# EAGLE board QuicOvero (EAGLE 5.06)
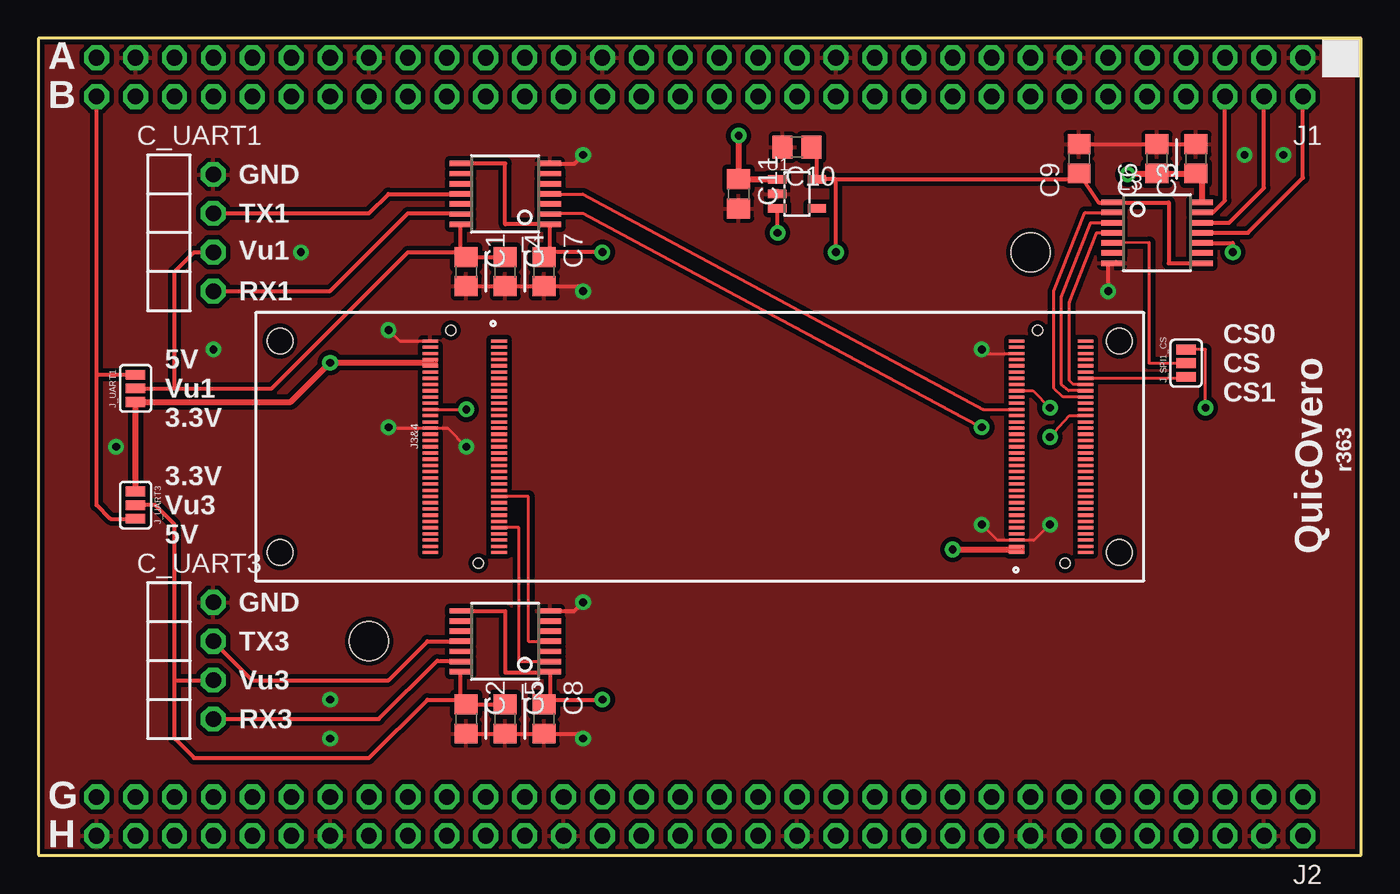
[diagram p0: board, top side]
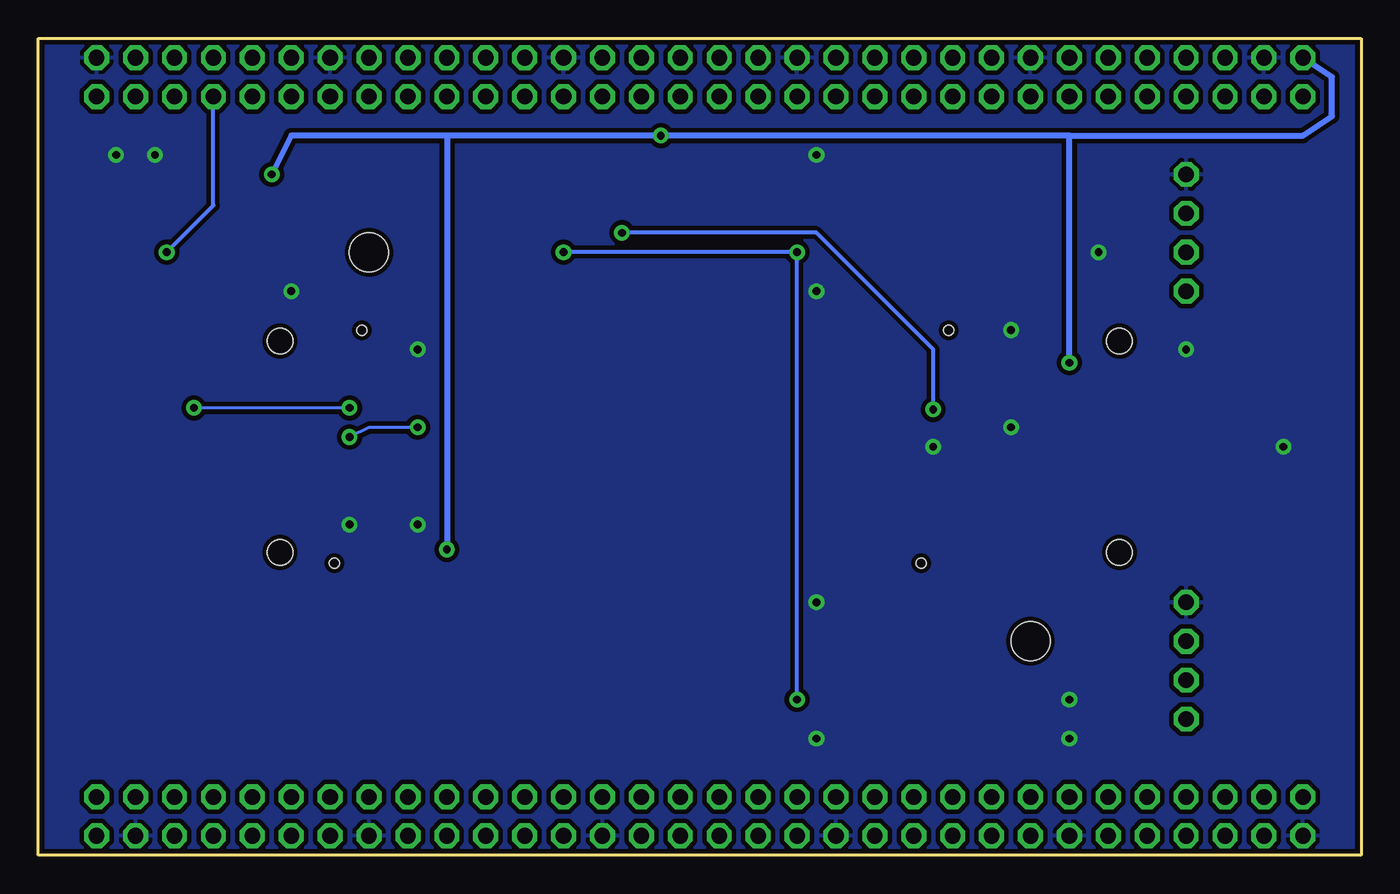
[diagram p1: board, bottom side, seen from below]

Size 86.36 x 53.34 mm. Coordinates in mm from the lower left corner, seen from the top.
Outline: 0,0 86.36,0 86.36,53.34 0,53.34 0,0
Copper layers (1*16): Top 0.035mm / dielectric 1.5mm / Bottom 0.035mm
Design rules "SparkFun": minimum track width 8mil, minimum drill 20mil, track to track 8mil, track to pad 8mil, pad to pad 8mil, via to via 8mil, smd to smd 8mil, copper to edge 10mil, drill to drill 8mil, minimum pad ring 12mil, minimum via ring 10mil, stop-mask expansion 4mil, vias tented up to drill 25mil, thermal gap 10mil
Net classes: 1 supply: width 0.203 mm; 4 xxwide: width 0.203 mm; 5 USB: width 0.191 mm
Holes 2.54 mm at 21.59,13.97 64.77,39.37

## Footprints (pad centres in the part's own frame; a part is rotated, then mirrored left to right if it is on the bottom)
C0805 = smd 1.3 x 1.5: 1 -0.95,0; 2 0.95,0
1X04/90 = drill 1.016 octagon: 1 -3.81,-0.01; 2 -1.27,-0.01; 3 1.27,-0.01; 4 3.81,-0.01
2X32/NOSILK = drill 1.016 octagon: 1 -39.37,-1.27; 2 -39.37,1.27; 3 -36.83,-1.27; 4 -36.83,1.27; 5 -34.29,-1.27; 6 -34.29,1.27; 7 -31.75,-1.27; 8 -31.75,1.27; 9 -29.21,-1.27; 10 -29.21,1.27; 11 -26.67,-1.27; 12 -26.67,1.27; 13 -24.13,-1.27; 14 -24.13,1.27; 15 -21.59,-1.27; 16 -21.59,1.27; 17 -19.05,-1.27; 18 -19.05,1.27; 19 -16.51,-1.27; 20 -16.51,1.27; 21 -13.97,-1.27; 22 -13.97,1.27; 23 -11.43,-1.27; 24 -11.43,1.27; 25 -8.89,-1.27; 26 -8.89,1.27; 27 -6.35,-1.27; 28 -6.35,1.27; 29 -3.81,-1.27; 30 -3.81,1.27; 31 -1.27,-1.27; 32 -1.27,1.27; 33 1.27,-1.27; 34 1.27,1.27; 35 3.81,-1.27; 36 3.81,1.27; 37 6.35,-1.27; 38 6.35,1.27; 39 8.89,-1.27; 40 8.89,1.27; 41 11.43,-1.27; 42 11.43,1.27; 43 13.97,-1.27; 44 13.97,1.27; 45 16.51,-1.27; 46 16.51,1.27; 47 19.05,-1.27; 48 19.05,1.27; 49 21.59,-1.27; 50 21.59,1.27; 51 24.13,-1.27; 52 24.13,1.27; 53 26.67,-1.27; 54 26.67,1.27; 55 29.21,-1.27; 56 29.21,1.27; 57 31.75,-1.27; 58 31.75,1.27; 59 34.29,-1.27; 60 34.29,1.27; 61 36.83,-1.27; 62 36.83,1.27; 63 39.37,-1.27; 64 39.37,1.27
GUMSTIX_OVERO = smd 1.016 x 0.203: ADCIN2 17.6,-2.032; ADCIN3 17.6,2.032; ADCIN4 17.6,5.283; ADCIN5 17.6,0.813; ADCIN6 17.6,0; ADCIN7 17.6,-4.47; AGND 17.6,1.219; AUXLF 17.6,6.096; AUXRF 17.6,4.877; EM_A1 -25.2,2.032; EM_A2 -20.7,2.845; EM_A3 -25.2,2.438; EM_A4 -25.2,3.251; EM_A5 -20.7,2.032; EM_A6 -25.2,1.626; EM_A7 -20.7,1.626; EM_A8 -20.7,2.438; EM_A9 -25.2,3.658; EM_A10 -25.2,2.845; EM_CLK -25.2,6.909; EM_D0 -25.2,1.219; EM_D1 -25.2,0; EM_D2 -20.7,1.219; EM_D3 -20.7,0.406; EM_D4 -20.7,-0.406; EM_D5 -20.7,-1.219; EM_D6 -25.2,-0.813; EM_D7 -25.2,-1.626; EM_D8 -25.2,0.406; EM_D9 -25.2,0.813; EM_D10 -20.7,0.813; EM_D11 -20.7,0; EM_D12 -20.7,-0.813; EM_D13 -25.2,-0.406; EM_D14 -25.2,-1.219; EM_D15 -20.7,-1.626; EM_NADV_ALE -20.7,4.47; EM_NBE0 -25.2,4.877; EM_NBE1 -25.2,6.502; EM_NCS0 -25.2,5.283; EM_NCS1 -25.2,4.47; EM_NCS4 -20.7,5.283; EM_NCS5_ETH0 -20.7,5.69; EM_NCS6 -25.2,5.69; EM_NOE -20.7,4.064; EM_NWE -20.7,4.877; EM_NWP -25.2,4.064; EM_WAIT0 -25.2,6.096; GND -20.7,6.096; GND@33 -20.7,-6.096; GND@56 17.6,-1.219; GND@70 17.6,-6.909; GPIO0_WAKEUP 13.1,-3.658; GPIO12_MMC3_CLK -25.2,-5.283; GPIO13_MMC3_CMD -20.7,-2.032; GPIO14_MMC3_DAT4 -20.7,-4.47; GPIO17_MMC3_D3 -20.7,-5.283; GPIO18_MMC3_D0 -20.7,-3.251; GPIO19_MMC3_D1 -25.2,-6.909; GPIO20_MMC3_D2 -25.2,-5.69; GPIO21_MMC3_DAT7 -20.7,-4.877; GPIO22_MMC3_DAT6 -25.2,-6.502; GPIO23_MMC3_DAT5 -25.2,-6.096; GPIO64_ETH0_NRESET -20.7,3.251; GPIO65_ETH1_IRQ1 -20.7,3.658; GPIO66_L_PCLK 13.1,5.69; GPIO67_L_LCLK 13.1,6.909; GPIO68_L_FCLK 13.1,6.502; GPIO69_L_BIAS 17.6,4.064; GPIO70_L_DD00 13.1,-6.096; GPIO71_L_DD01 13.1,-6.502; GPIO72_L_DD02 13.1,-4.877; GPIO73_L_DD03 13.1,-5.69; GPIO74_L_DD04 13.1,-4.47; GPIO75_L_DD05 13.1,-5.283; GPIO76_L_DD06 13.1,6.096; GPIO77_L_DD07 13.1,4.47; GPIO78_L_DD08 13.1,4.877; GPIO79_L_DD09 13.1,4.064; GPIO80_L_DD10 13.1,-2.845; GPIO81_L_DD11 13.1,-2.438; GPIO82_L_DD12 17.6,-2.845; GPIO83_L_DD13 13.1,-0.406; GPIO84_L_DD14 13.1,0.406; GPIO85_L_DD15 13.1,0.813; GPIO86_L_DD16 17.6,3.658; GPIO87_L_DD17 13.1,2.438; GPIO88_L_DD18 13.1,2.845; GPIO89_L_DD19 13.1,3.658; GPIO90_L_DD20 17.6,3.251; GPIO91_L_DD21 13.1,2.032; GPIO92_L_DD22 13.1,-1.219; GPIO93_L_DD23 17.6,-3.251; GPIO114_SPI1_NIRQ -25.2,-4.877; GPIO127_TS_IRQ 13.1,-4.064; GPIO128_GPS_PPS 13.1,-1.626; GPIO144_GPT9_PWM 13.1,0; GPIO145_GPT10_PWM 17.6,-0.813; GPIO146_GPT11_PWM 13.1,1.219; GPIO147_GPT8_PWM 13.1,-0.813; GPIO148_TXD1 -20.7,-2.438; GPIO149_MMC3_CD -25.2,-2.845; GPIO150_MMC3_WP -25.2,-2.438; GPIO151_RXD1 -25.2,-2.032; GPIO163_IR_CTS3 13.1,1.626; GPIO165_IR_RXD3 13.1,5.283; GPIO166_IR_TXD3 13.1,3.251; GPIO168_USBH_CPEN -20.7,-4.064; GPIO170_HDQ_1WIRE 17.6,2.438; GPIO171_SPI1_CLK -25.2,-4.064; GPIO172_SPI1_MOSI -25.2,-3.658; GPIO173_SPI1_MISO -25.2,-3.251; GPIO174_SPI1_CS0 -20.7,-3.658; GPIO175_SPI1_CS1 -25.2,-4.47; GPIO176_ETH0_IRQ -20.7,-2.845; GPIO184_I2C3_SCL 13.1,-2.032; GPIO185_I2C3_SDA 13.1,-3.251; HSOLF 17.6,-6.096; HSORF 17.6,-6.502; MIC_MAIN_MF 17.6,-1.626; MIC_SUB_MF 17.6,5.69; N_MANUAL_RESET 13.1,-6.909; NC@62 17.6,-3.658; NC@63 17.6,-4.064; POWERON 17.6,-4.877; PWM0 17.6,4.47; PWM1 17.6,1.626; SYSEN 17.6,-2.438; USBH_DM -20.7,-6.909; USBH_DP -20.7,-6.502; USBH_VBUS -20.7,-5.69; USBOTG_DM 17.6,6.502; USBOTG_DP 17.6,6.909; USBOTG_ID 17.6,2.845; USBOTG_VBUS 17.6,-0.406; VBACKUP 17.6,0.406; VSYSTEM@1 -20.7,6.909; VSYSTEM@2 -20.7,6.502; VSYSTEM@66 17.6,-5.283; VSYSTEM@67 17.6,-5.69 | hole 1.65: 27.4,6.9; 27.4,-6.9; -27.4,6.9; -27.4,-6.9 | hole 0.65: -23.85,7.6; -22.05,-7.6; 14.45,7.6; 16.25,-7.6
SJ_3 = smd 0.635 x 1.27: 1 -0.889,0; 2 0,0; 3 0.889,0
TSSOP-14 = smd 1.422 x 0.356: 1 -2.921,1.981; 2 -2.921,1.321; 3 -2.921,0.66; 4 -2.921,0; 5 -2.921,-0.66; 6 -2.921,-1.321; 7 -2.921,-1.981; 8 2.921,-1.981; 9 2.921,-1.321; 10 2.921,-0.66; 11 2.921,0; 12 2.921,0.66; 13 2.921,1.321; 14 2.921,1.981
SOT-23-5 = smd 0.55 x 1.2: 1 -0.95,-1.3; 2 0,-1.3; 3 0.95,-1.3; 4 0.95,1.3; 5 -0.95,1.3

## Placement (x,y rotation side)
C1  1uF  [C0805]  27.94,38.1 270 top
C2  1uF  [C0805]  27.94,8.89 270 top
C3  1uF  [C0805]  75.56,45.47 90 top
C4  0.1uF  [C0805]  30.48,38.1 270 top
C5  0.1uF  [C0805]  30.48,8.89 270 top
C6  0.1uF  [C0805]  73.03,45.47 90 top
C7  0.1uF  [C0805]  33.02,38.1 270 top
C8  0.1uF  [C0805]  33.02,8.89 270 top
C9  0.1uF  [C0805]  67.94,45.47 90 top
C10  10uF  [C0805]  49.53,46.23 180 top
C11  10uF  [C0805]  45.72,43.18 270 top
C_UART1  M04PTH90  [1X04/90]  11.43,40.64 270 top
C_UART3  M04PTH90  [1X04/90]  11.43,12.7 270 top
J1  CARDSTAC_FULL_STD_ROWS_AB_2X32_NOSILK  [2X32/NOSILK]  43.18,50.8 180 top
J2  CARDSTAC_FULL_STD_ROWS_GH_2X32_NOSILK  [2X32/NOSILK]  43.18,2.54 180 top
J3&4  GUMSTIX_OVERO  [GUMSTIX_OVERO]  43.18,26.67 180 top
J_SPI1_CS  JUMPER-3SMD  [SJ_3]  74.93,32.13 90 top
J_UART1  JUMPER-3SMD  [SJ_3]  6.35,30.48 90 top
J_UART3  JUMPER-3SMD  [SJ_3]  6.35,22.86 270 top
L1  MAX3391EEUD+  [TSSOP-14]  30.48,43.18 180 top
L2  MAX3391EEUD+  [TSSOP-14]  30.48,13.97 180 top
L3  MAX3390EEUD+  [TSSOP-14]  73.03,40.64 0 top
U1  MIC5247-1.8V  [SOT-23-5]  49.53,43.18 270 top

## Library data of the parts
C1-C9 C_UART1 C_UART3 J1 J2 J_SPI1_CS J_UART1 J_UART3 L1-L3 = Robot
C10 = Robot; DM: 0; DR: 90.000; DX: 43.000; DY: 18.800; SHEETNO: 5
C11 = Robot; DM: 0; DR: 90.000; DX: 49.400; DY: 19.200; SHEETNO: 5
J3&4 = Robot; DM: 0; DR: 0.000; DX: 33.400; DY: 8.800; SHEETNO: 3
U1 = qualified_1; DM: 0; DR: 90.000; DX: 46.400; DY: 19.200; SHEETNO: 5

## Nets
1.8V: C7.1 C8.1 C9.1 C10.1 L1.1 L1.8 L2.1 L2.8 L3.1 L3.8 U1.5
3.3V [supply]: C3.1 C6.1 C11.1 J1.63 J3&4.VSYSTEM@1 J3&4.VSYSTEM@2 J3&4.VSYSTEM@66 J3&4.VSYSTEM@67 J_UART1.1 J_UART3.1 L3.14 U1.1
3.3V_ROWH [supply]: J2.2
5V: J1.64 J_UART1.3 J_UART3.3
5V_ROWG: J2.1
ADCIN2: J3&4.ADCIN2
ADCIN3: J3&4.ADCIN3
ADCIN4: J3&4.ADCIN4
ADCIN5: J3&4.ADCIN5
ADCIN6: J3&4.ADCIN6
ADCIN7: J3&4.ADCIN7
AGND: J3&4.AGND
DUMMY_AUX1: J2.3
GND: C1.2 C2.2 C3.2 C4.2 C5.2 C6.2 C7.2 C8.2 C9.2 C10.2 C11.2 C_UART1.1 C_UART3.1 J1.1 J1.13 J1.25 J1.37 J1.49 J1.61 J2.4 J2.16 J2.28 J2.40 J2.52 J2.64 J3&4.GND J3&4.GND@33 J3&4.GND@56 J3&4.GND@70 L1.7 L2.7 L3.7 U1.2
GPIO0_WAKEUP: J3&4.GPIO0_WAKEUP
GPIO12_MMC3_CLK: J3&4.GPIO12_MMC3_CLK
GPIO13_MMC3_CMD: J3&4.GPIO13_MMC3_CMD
GPIO14_MMC3_D4: J3&4.GPIO14_MMC3_DAT4
GPIO17_MMC3_D3: J3&4.GPIO17_MMC3_D3
GPIO18_MMC3_D0: J3&4.GPIO18_MMC3_D0
GPIO18_MMC3_D2: J3&4.GPIO20_MMC3_D2
GPIO19_MMC3_D1: J3&4.GPIO19_MMC3_D1
GPIO21_MMC3_D7: J3&4.GPIO21_MMC3_DAT7
GPIO22_MMC3_D6: J3&4.GPIO22_MMC3_DAT6
GPIO23_MMC3_D5: J3&4.GPIO23_MMC3_DAT5
GPIO41_OTG_ID: J3&4.USBOTG_ID
GPIO114_SPI1_NIRQ: J3&4.GPIO114_SPI1_NIRQ
GPIO127_TS_IRQ: J3&4.GPIO127_TS_IRQ
GPIO128_GPS_PPS: J3&4.GPIO128_GPS_PPS
GPIO144_PWM9: J3&4.GPIO144_GPT9_PWM
GPIO145_PWM10: J3&4.GPIO145_GPT10_PWM
GPIO146_PWM11: J3&4.GPIO146_GPT11_PWM
GPIO147_PWM8: J3&4.GPIO147_GPT8_PWM
GPIO149_MMC3_CD: J3&4.GPIO149_MMC3_CD
GPIO150_MMC3_WP: J3&4.GPIO150_MMC3_WP
GPIO151_RXD1: J3&4.GPIO151_RXD1 L1.2
GPIO158_TXD1: J3&4.GPIO148_TXD1 L1.4
GPIO163_IR_CTS3: J3&4.GPIO163_IR_CTS3
GPIO165_IR_RXD3: J3&4.GPIO165_IR_RXD3 L2.2
GPIO166_IR_TXD3: J3&4.GPIO166_IR_TXD3 L2.4
GPIO168_USBH_CPEN: J3&4.GPIO168_USBH_CPEN
GPIO170_HDQ_1WIRE: J3&4.GPIO170_HDQ_1WIRE
GPIO171_SPI1_CLK: J3&4.GPIO171_SPI1_CLK L3.4
GPIO172_SPI1_MOSI: J3&4.GPIO172_SPI1_MOSI L3.3
GPIO173_SPI1_MISO: J3&4.GPIO173_SPI1_MISO L3.2
GPIO174_SPI1_CS0: J3&4.GPIO174_SPI1_CS0 J_SPI1_CS.3
GPIO175_SPI1_CS1: J3&4.GPIO175_SPI1_CS1 J_SPI1_CS.1
GPIO184_SCL3: J3&4.GPIO184_I2C3_SCL
GPIO185_SDA3: J3&4.GPIO185_I2C3_SDA
HSOL [analog]: J3&4.HSOLF
HSOR [analog]: J3&4.HSORF
L_BIAS: J3&4.GPIO69_L_BIAS
L_DD0: J3&4.GPIO70_L_DD00
L_DD1: J3&4.GPIO71_L_DD01
L_DD2: J3&4.GPIO72_L_DD02
L_DD3: J3&4.GPIO73_L_DD03
L_DD4: J3&4.GPIO74_L_DD04
L_DD5: J3&4.GPIO75_L_DD05
L_DD6: J3&4.GPIO76_L_DD06
L_DD7: J3&4.GPIO77_L_DD07
L_DD8: J3&4.GPIO78_L_DD08
L_DD9: J3&4.GPIO79_L_DD09
L_DD10: J3&4.GPIO80_L_DD10
L_DD11: J3&4.GPIO81_L_DD11
L_DD12: J3&4.GPIO82_L_DD12
L_DD13: J3&4.GPIO83_L_DD13
L_DD14: J3&4.GPIO84_L_DD14
L_DD15: J3&4.GPIO85_L_DD15
L_DD16: J3&4.GPIO86_L_DD16
L_DD17: J3&4.GPIO87_L_DD17
L_DD18: J3&4.GPIO88_L_DD18
L_DD19: J3&4.GPIO89_L_DD19
L_DD20: J3&4.GPIO90_L_DD20
L_DD21: J3&4.GPIO91_L_DD21
L_DD22: J3&4.GPIO92_L_DD22
L_DD23: J3&4.GPIO93_L_DD23
L_HSYNC: J3&4.GPIO67_L_LCLK
L_PCLK: J3&4.GPIO66_L_PCLK
L_VSYNC: J3&4.GPIO68_L_FCLK
LINE_IN_LA [analog]: J3&4.AUXRF
LINE_IN_RA [analog]: J3&4.AUXLF
MIC_MAIN: J3&4.MIC_MAIN_MF
MIC_SUB: J3&4.MIC_SUB_MF
NRESET: J3&4.N_MANUAL_RESET
POWERON: J3&4.POWERON
PWM0: J3&4.PWM0
PWM1: J3&4.PWM1
SH-RX1: C_UART1.4 L1.13
SH-RX3: C_UART3.4 L2.13
SH-SPI1_CLK: J1.2 L3.11
SH-SPI1_CS: J1.8 L3.10
SH-SPI1_MISO: J1.6 L3.13
SH-SPI1_MOSI: J1.4 L3.12
SH-TX1: C_UART1.2 L1.11
SH-TX3: C_UART3.2 L2.11
SPI1_CS: J_SPI1_CS.2 L3.5
SYS_EN: J3&4.SYSEN U1.3
USB_OTG_DM [USB]: J3&4.USBOTG_DM
USB_OTG_DP [USB]: J3&4.USBOTG_DP
USB_OTG_VBUS [xxwide]: J3&4.USBOTG_VBUS
USBH_DM [USB]: J3&4.USBH_DM
USBH_DP [USB]: J3&4.USBH_DP
USBH_VBUS [xxwide]: J3&4.USBH_VBUS
VAUX1_12V: J1.62
VBACKUP: J3&4.VBACKUP
VCC-UART1: C1.1 C4.1 C_UART1.3 J_UART1.2 L1.14
VCC-UART3: C2.1 C5.1 C_UART3.3 J_UART3.2 L2.14
X_ADDR_01: J3&4.EM_A1
X_ADDR_02: J3&4.EM_A2
X_ADDR_03: J3&4.EM_A3
X_ADDR_04: J3&4.EM_A4
X_ADDR_05: J3&4.EM_A5
X_ADDR_06: J3&4.EM_A6
X_ADDR_07: J3&4.EM_A7
X_ADDR_08: J3&4.EM_A8
X_ADDR_09: J3&4.EM_A9
X_ADDR_10: J3&4.EM_A10
X_CLK: J3&4.EM_CLK
X_DATA_0: J3&4.EM_D0
X_DATA_1: J3&4.EM_D1
X_DATA_2: J3&4.EM_D2
X_DATA_3: J3&4.EM_D3
X_DATA_4: J3&4.EM_D4
X_DATA_5: J3&4.EM_D5
X_DATA_6: J3&4.EM_D6
X_DATA_7: J3&4.EM_D7
X_DATA_8: J3&4.EM_D8
X_DATA_9: J3&4.EM_D9
X_DATA_10: J3&4.EM_D10
X_DATA_11: J3&4.EM_D11
X_DATA_12: J3&4.EM_D12
X_DATA_13: J3&4.EM_D13
X_DATA_14: J3&4.EM_D14
X_DATA_15: J3&4.EM_D15
X_GPIO64_ETH0_NRESET: J3&4.GPIO64_ETH0_NRESET
X_GPIO65_ETH1_IRQ1: J3&4.GPIO65_ETH1_IRQ1
X_GPIO176_ETH0_IRQ: J3&4.GPIO176_ETH0_IRQ
X_NADV_ALE: J3&4.EM_NADV_ALE
X_NBE0: J3&4.EM_NBE0
X_NBE1: J3&4.EM_NBE1
X_NCS0: J3&4.EM_NCS0
X_NCS1: J3&4.EM_NCS1
X_NCS4: J3&4.EM_NCS4
X_NCS5_ETHO: J3&4.EM_NCS5_ETH0
X_NCS6: J3&4.EM_NCS6
X_NMWP: J3&4.EM_NWP
X_NOE: J3&4.EM_NOE
X_NPWE: J3&4.EM_NWE
X_RDY: J3&4.EM_WAIT0

## Tracks (layer width: path | path; a pad name or v marks a point on that pad's centre or on a via)
1.8V  (via drill 0.51)
  Top 0.254: L3.8 73.79,38.66 73.79,42.62 L3.1 69.22,42.62 C9.1 67.94,44.13 52.07,44.13 | L2.8 30.48,15.95 30.48,11.94 33.4,11.94 L2.1 33.4,10.16 | 33.4,10.16 33.4,9.78 C8.1 | C10.1 50.83,45.72 U1.5 52.07,44.13 | L1.8 30.48,45.16 30.48,41.2 L1.1 33.4,39.37 | C7.1 33.4,39.05 33.4,39.37 | v52.07,39.37 52.07,44.13 | v36.83,39.37 33.4,39.37 | 33.4,10.16 v36.83,10.16
  Bottom 0.254: v52.07,39.37 v36.83,39.37 v36.83,10.16
3.3V  (via drill 0.51)
  Top 0.203: J3&4.VSYSTEM@66 25.98,31.95 25.98,32.36 J3&4.VSYSTEM@67 25.7,32.16 | 64.01,19.96 J3&4.VSYSTEM@2 64.26,20.17 64.26,19.76 J3&4.VSYSTEM@1
  Top 0.254: C3.1 75.95,44.52
  Top 0.406: 25.7,32.16 v19.05,32.16 16.48,29.59 J_UART1.1 J_UART3.1 | U1.1 C11.1 v45.72,46.99 | v59.69,19.96 64.01,19.96 | 75.95,44.52 L3.14 | C3.1 C6.1 71.12,44.52 v71.12,44.45
  Bottom 0.406: J1.63 1.91,50.8 1.91,48.26 3.81,46.99 19.05,46.99 | 19.05,46.99 v45.72,46.99 59.69,46.99 | v19.05,32.16 19.05,46.99 | 59.69,46.99 v59.69,19.96 | 59.69,46.99 69.85,46.99 v71.12,44.45
5V
  Top 0.254: 3.81,31.37 J_UART1.3 | 3.81,31.37 J1.64 | J_UART3.3 4.7,21.97 3.81,22.86 3.81,31.37
GND  (via drill 0.51)
  Top 0.203: v22.86,27.94 22.86,27.89 J3&4.GND@56 26.72,27.89 v27.94,26.67 | J3&4.GND@33 61.85,32.77 v61.59,33.02 | v61.59,21.59 62.61,20.57 J3&4.GND 65.02,20.57 v66.04,21.59 | 25.65,33.58 J3&4.GND@70 23.57,33.58 v22.86,34.29
  Top 0.254: C1.2 C4.2 C7.2 35.24,37.15 v35.56,36.83 | C2.2 C5.2 C8.2 35.24,7.94 v35.56,7.62 | L2.7 35,15.95 v35.56,16.51 | L1.7 35,45.16 v35.56,45.72 | C3.2 C6.2 C9.2 | 70.36,38.73 L3.7 69.85,38.66 v69.85,36.83
  other vias: 5.08,26.67 19.05,10.16 19.05,7.62 17.14,39.37 11.43,33.02 78.74,45.72 81.28,45.72
  pour Bottom (isolate 0.305): 0,0 0,53.34 86.36,53.34 86.36,0
  pour Top (isolate 0.305): 0,0 0,53.34 86.36,53.34 86.36,0
GPIO151_RXD1  (via drill 0.51)
  Top 0.203: J3&4.GPIO151_RXD1 67.31,28.7 v66.04,27.3 | v61.59,27.94 35.56,41.91 33.4,41.91
  Top 0.254: L1.2 33.4,41.91
  Bottom 0.203: v61.59,27.94 64.77,27.94 v66.04,27.3
GPIO158_TXD1
  Top 0.203: J3&4.GPIO148_TXD1 61.7,29.11 35.56,43.18 L1.4
GPIO165_IR_RXD3
  Top 0.203: L2.2 31.37,12.65 31.37,21.39 J3&4.GPIO165_IR_RXD3
GPIO166_IR_TXD3
  Top 0.203: J3&4.GPIO166_IR_TXD3 32,23.42 32,13.97 L2.4
GPIO171_SPI1_CLK
  Top 0.203: J3&4.GPIO171_SPI1_CLK 67.56,30.73 67.31,30.99 67.31,36.07 69.09,40.64 L3.4
GPIO172_SPI1_MOSI
  Top 0.203: J3&4.GPIO172_SPI1_MOSI 67.27,30.33 66.8,30.73 66.8,36.45 68.71,41.3 L3.3
GPIO173_SPI1_MISO
  Top 0.203: J3&4.GPIO173_SPI1_MISO 66.89,29.92 66.29,30.48 66.29,36.83 68.33,41.96 L3.2
GPIO174_SPI1_CS0  (via drill 0.51)
  Top 0.203: v76.2,29.21 76.2,33.02 J_SPI1_CS.3 | J3&4.GPIO174_SPI1_CS0 64.92,30.33 v66.04,29.21
  Bottom 0.203: v66.04,29.21 v76.2,29.21
GPIO175_SPI1_CS1
  Top 0.203: J3&4.GPIO175_SPI1_CS1 74.93,31.14 J_SPI1_CS.1
SH-RX1
  Top 0.254: C_UART1.4 19.05,36.84 24.13,41.91 27.56,41.91 L1.13
SH-RX3
  Top 0.254: C_UART3.4 22.23,8.89 26.04,12.7 27.56,12.7 L2.13
SH-SPI1_CLK
  Top 0.254: L3.11 78.96,40.64 82.55,44.23 J1.2
SH-SPI1_CS  (via drill 0.51)
  Top 0.254: L3.10 77.98,39.98 v77.98,39.37
  Bottom 0.254: v77.98,39.37 74.93,42.42 J1.8
SH-SPI1_MISO
  Top 0.254: L3.13 76.69,41.96 77.47,42.74 J1.6
SH-SPI1_MOSI
  Top 0.254: L3.12 77.74,41.3 80.01,43.57 J1.4
SH-TX1
  Top 0.254: C_UART1.2 21.59,41.91 22.86,43.18 L1.11
SH-TX3
  Top 0.254: C_UART3.2 13.97,11.43 22.86,11.43 25.4,13.97 L2.11
SPI1_CS
  Top 0.203: L3.5 72.52,40.01 72.52,32.13 J_SPI1_CS.2
SYS_EN  (via drill 0.51)
  Top 0.203: J3&4.SYSEN v27.94,29.11
  Top 0.254: U1.3 48.26,42.23 v48.26,40.64
  Bottom 0.254: v27.94,29.11 27.94,33.01 35.57,40.64 v48.26,40.64
VCC-UART1
  Top 0.254: C4.1 C1.1 27.94,39.37 27.56,39.37 | J_UART1.2 8.89,30.48 | 8.89,30.48 8.89,38.1 10.16,39.37 C_UART1.3 | 27.56,39.37 L1.14 | 27.56,39.37 24.13,39.37 15.24,30.48 8.89,30.48
VCC-UART3
  Top 0.254: C5.1 C2.1 27.94,10.16 27.56,10.16 | 8.89,11.43 8.89,21.59 7.62,22.86 J_UART3.2 | 8.89,11.43 C_UART3.3 | 27.56,10.16 L2.14 | 8.89,11.43 8.89,7.62 10.16,6.35 21.59,6.35 25.4,10.16 27.56,10.16

## Text on the board
tPlace: A | B | GND | TX1 | Vu1 | RX1 | CS0 | 5V | CS | Vu1 | CS1 | 3.3V | r363 | 3.3V | Vu3 | 5V | QuicOvero | GND | TX3 | Vu3 | RX3 | G | H